# EAGLE board controlsboardfile (EAGLE 9.6.2)
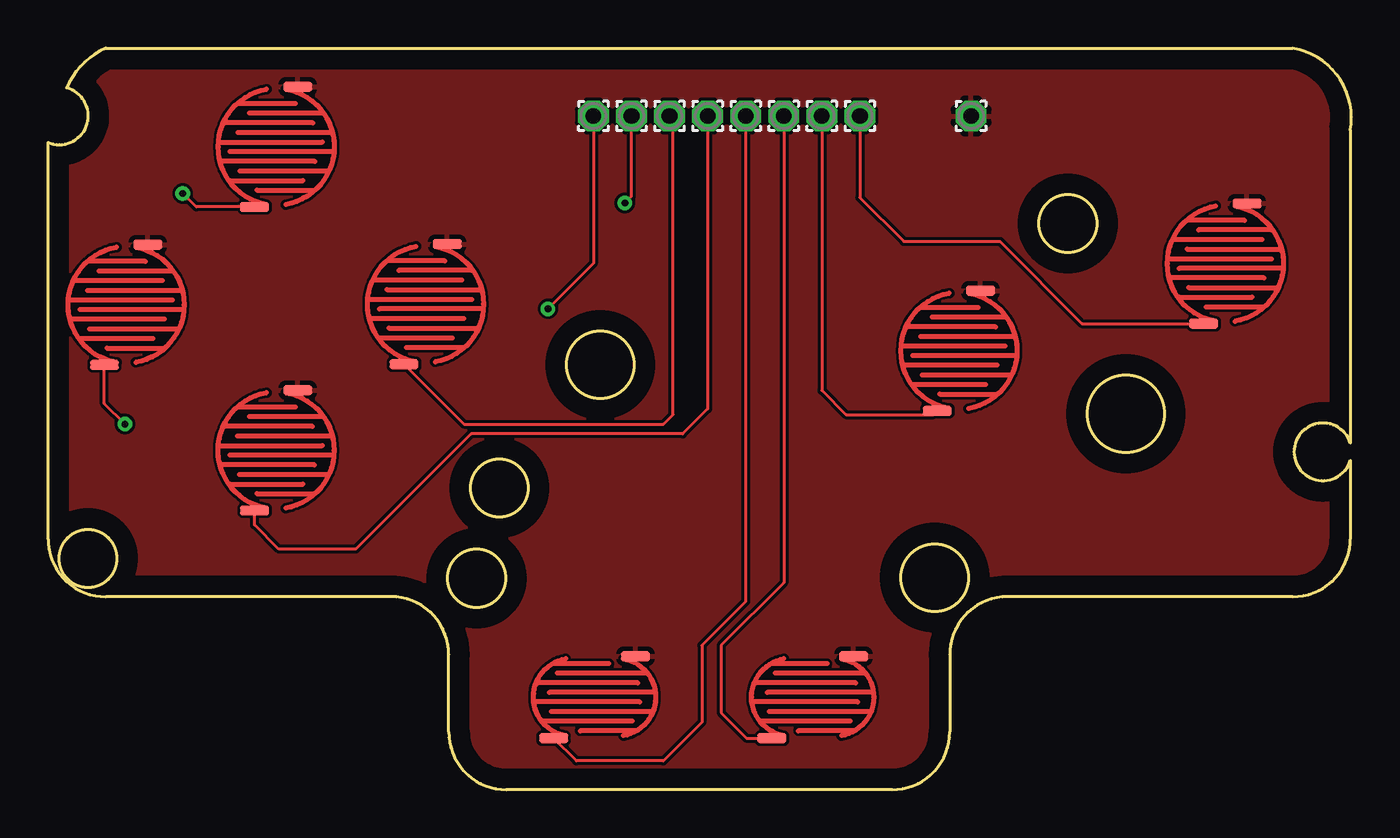
[diagram p0: board, top side]
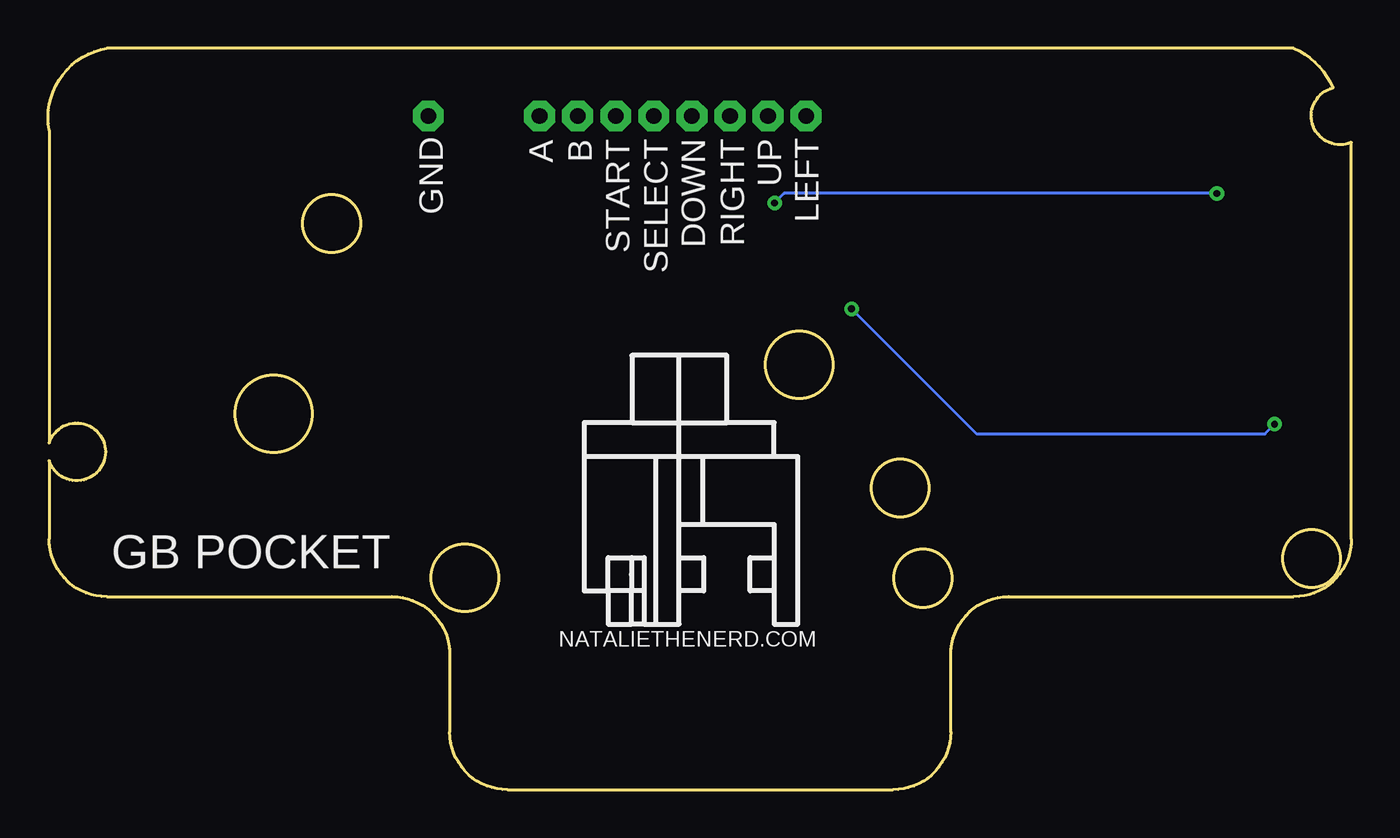
[diagram p1: board, bottom side, seen from below]

Size 67.78 x 38.55 mm. Coordinates in mm from the lower left corner, seen from the top.
Outline: 67.73,34.28 arc90 64.73,38.55 3,38.55 arc43 0.96,36.48 arc-189 0,33.65 0,13.03 arc90 3,10.03 17.84,10.03 arc-90 20.84,7.03 20.84,3 arc90 23.84,0 43.89,0 arc90 46.89,3 46.89,7.03 arc-90 49.89,10.03 64.73,10.03 arc90 67.73,13.03 67.73,17.12 arc-325 67.73,18.01 67.73,34.28
Outline: circle at 22.28,10.99 radius 1.5
Outline: circle at 23.47,15.68 radius 1.5
Outline: circle at 28.71,22.09 radius 1.75
Outline: circle at 2.08,12.03 radius 1.5
Outline: circle at 46.1,11.02 radius 1.75
Outline: circle at 56.05,19.54 radius 2
Outline: circle at 53.03,29.43 radius 1.5
Copper layers (1*16): Top 0.035mm / dielectric 1.5mm / Bottom 0.035mm
Design rules "default": minimum track width 6mil, minimum drill 0.35mm, track to track 6mil, track to pad 6mil, pad to pad 6mil, via to via 6mil, smd to smd 6mil, copper to edge 40mil, drill to drill 6mil, minimum pad ring 10mil, minimum via ring 8mil, stop-mask expansion 4mil, vias tented up to drill 0mil, thermal gap 10mil

## Footprints (pad centres in the part's own frame; a part is rotated, then mirrored left to right if it is on the bottom)
1,6/0,8 = drill 0.813 pad 1.6 octagon: 1 0,0
CONDUCTIVE_BUTTON = smd 1.5 x 0.508: P$ACTIVE 1.125,3.125; P$GND -1.125,-3.125
CONDUCTIVE_BUTTON_STARTSELECT = smd 1.5 x 0.508: P$ACTIVE 2.125,2.125; P$GND -2.125,-2.125

## Placement (x,y rotation side)
A  [1,6/0,8]  42.22,35.02 0 top
B  [1,6/0,8]  40.24,35.02 0 top
DOWN  [1,6/0,8]  34.3,35.02 0 top
GND  [1,6/0,8]  48,35.02 0 top
LEFT  [1,6/0,8]  28.36,35.02 0 top
RIGHT  [1,6/0,8]  32.32,35.02 0 top
SELECT  [1,6/0,8]  36.28,35.02 0 top
START  [1,6/0,8]  38.26,35.02 0 top
U$1  CONDUCTIVE_BUTTON  [CONDUCTIVE_BUTTON]  47.37,22.82 0 top
U$2  CONDUCTIVE_BUTTON  [CONDUCTIVE_BUTTON]  61.22,27.35 0 top
U$3  CONDUCTIVE_BUTTON  [CONDUCTIVE_BUTTON]  4.06,25.21 0 top
U$4  CONDUCTIVE_BUTTON  [CONDUCTIVE_BUTTON]  11.86,33.42 0 top
U$5  CONDUCTIVE_BUTTON  [CONDUCTIVE_BUTTON]  19.63,25.24 0 top
U$6  CONDUCTIVE_BUTTON  [CONDUCTIVE_BUTTON]  11.86,17.64 0 top
U$7  CONDUCTIVE_BUTTON_STARTSELECT  [CONDUCTIVE_BUTTON_STARTSELECT]  28.42,4.81 0 top
U$8  CONDUCTIVE_BUTTON_STARTSELECT  [CONDUCTIVE_BUTTON_STARTSELECT]  39.76,4.81 0 top
U$9  [NEWLOGO]  40,8.5 0 bottom
UP  [1,6/0,8]  30.34,35.02 0 top

## Library data of the parts
A B DOWN GND LEFT RIGHT SELECT START UP = wirepad
U$1-U$8 = 32teeth - Conductive Buttons
U$9 = logo

## Nets
GND: GND.1 U$1.P$ACTIVE U$2.P$ACTIVE U$3.P$ACTIVE U$4.P$ACTIVE U$5.P$ACTIVE U$6.P$ACTIVE U$7.P$ACTIVE U$8.P$ACTIVE
N$4: RIGHT.1 U$5.P$GND
N$5: DOWN.1 U$6.P$GND
N$6: SELECT.1 U$7.P$GND
N$7: START.1 U$8.P$GND
N$8: LEFT.1 U$3.P$GND
N$9: A.1 U$2.P$GND
N$10: B.1 U$1.P$GND
N$11: U$4.P$GND UP.1

## Tracks (layer width: path | path; a pad name or v marks a point on that pad's centre or on a via)
GND
  pour Top: -2.5,37.5 -2.5,11 0,8.5 11,-2.5 48,-2.5 57,-2.5 68,8.5 69,9.5 69,39.5 -0.5,39.5
N$4
  Top 0.152: U$5.P$GND 21.62,19 32,19 32.5,19.5 32.5,34.84 RIGHT.1
N$5
  Top 0.152: DOWN.1 34.3,19.8 33,18.5 22,18.5 16,12.5 12,12.5 10.73,13.77 U$6.P$GND
N$6
  Top 0.152: SELECT.1 36.28,9.78 34,7.5 34,3.5 32,1.5 27.48,1.5 U$7.P$GND
N$7
  Top 0.152: START.1 38.26,10.76 35,7.5 35,4 36.32,2.68 U$8.P$GND
N$8  (via drill 0.35)
  Top 0.152: LEFT.1 28.36,27.36 v26,25 | v4,19 2.93,20.07 U$3.P$GND
  Bottom 0.152: v26,25 19.5,18.5 4.5,18.5 v4,19
N$9
  Top 0.152: A.1 42.22,30.78 44.5,28.5 49.5,28.5 53.77,24.23 U$2.P$GND
N$10
  Top 0.152: B.1 40.24,20.76 41.5,19.5 46.05,19.5 U$1.P$GND
N$11  (via drill 0.35)
  Top 0.152: U$4.P$GND 7.71,30.29 v7,31 | v30,30.5 30.34,30.84 UP.1
  Bottom 0.152: v7,31 29.5,31 v30,30.5

## Text on the board
bPlace: GB POCKET